# Altium PCB SPI-主板-开关.PcbDoc (part 1 of 11)
Units mm, origin at the board's own origin, x right, y up, seen from the top; angles counter-clockwise.
Board outline 97.69 x 103.45 mm, 2 copper layers (Top Layer, Bottom Layer); 86 components, 63 nets, 260 pads, 250 vias.
Unrouted connection lines stored in the file: 6.
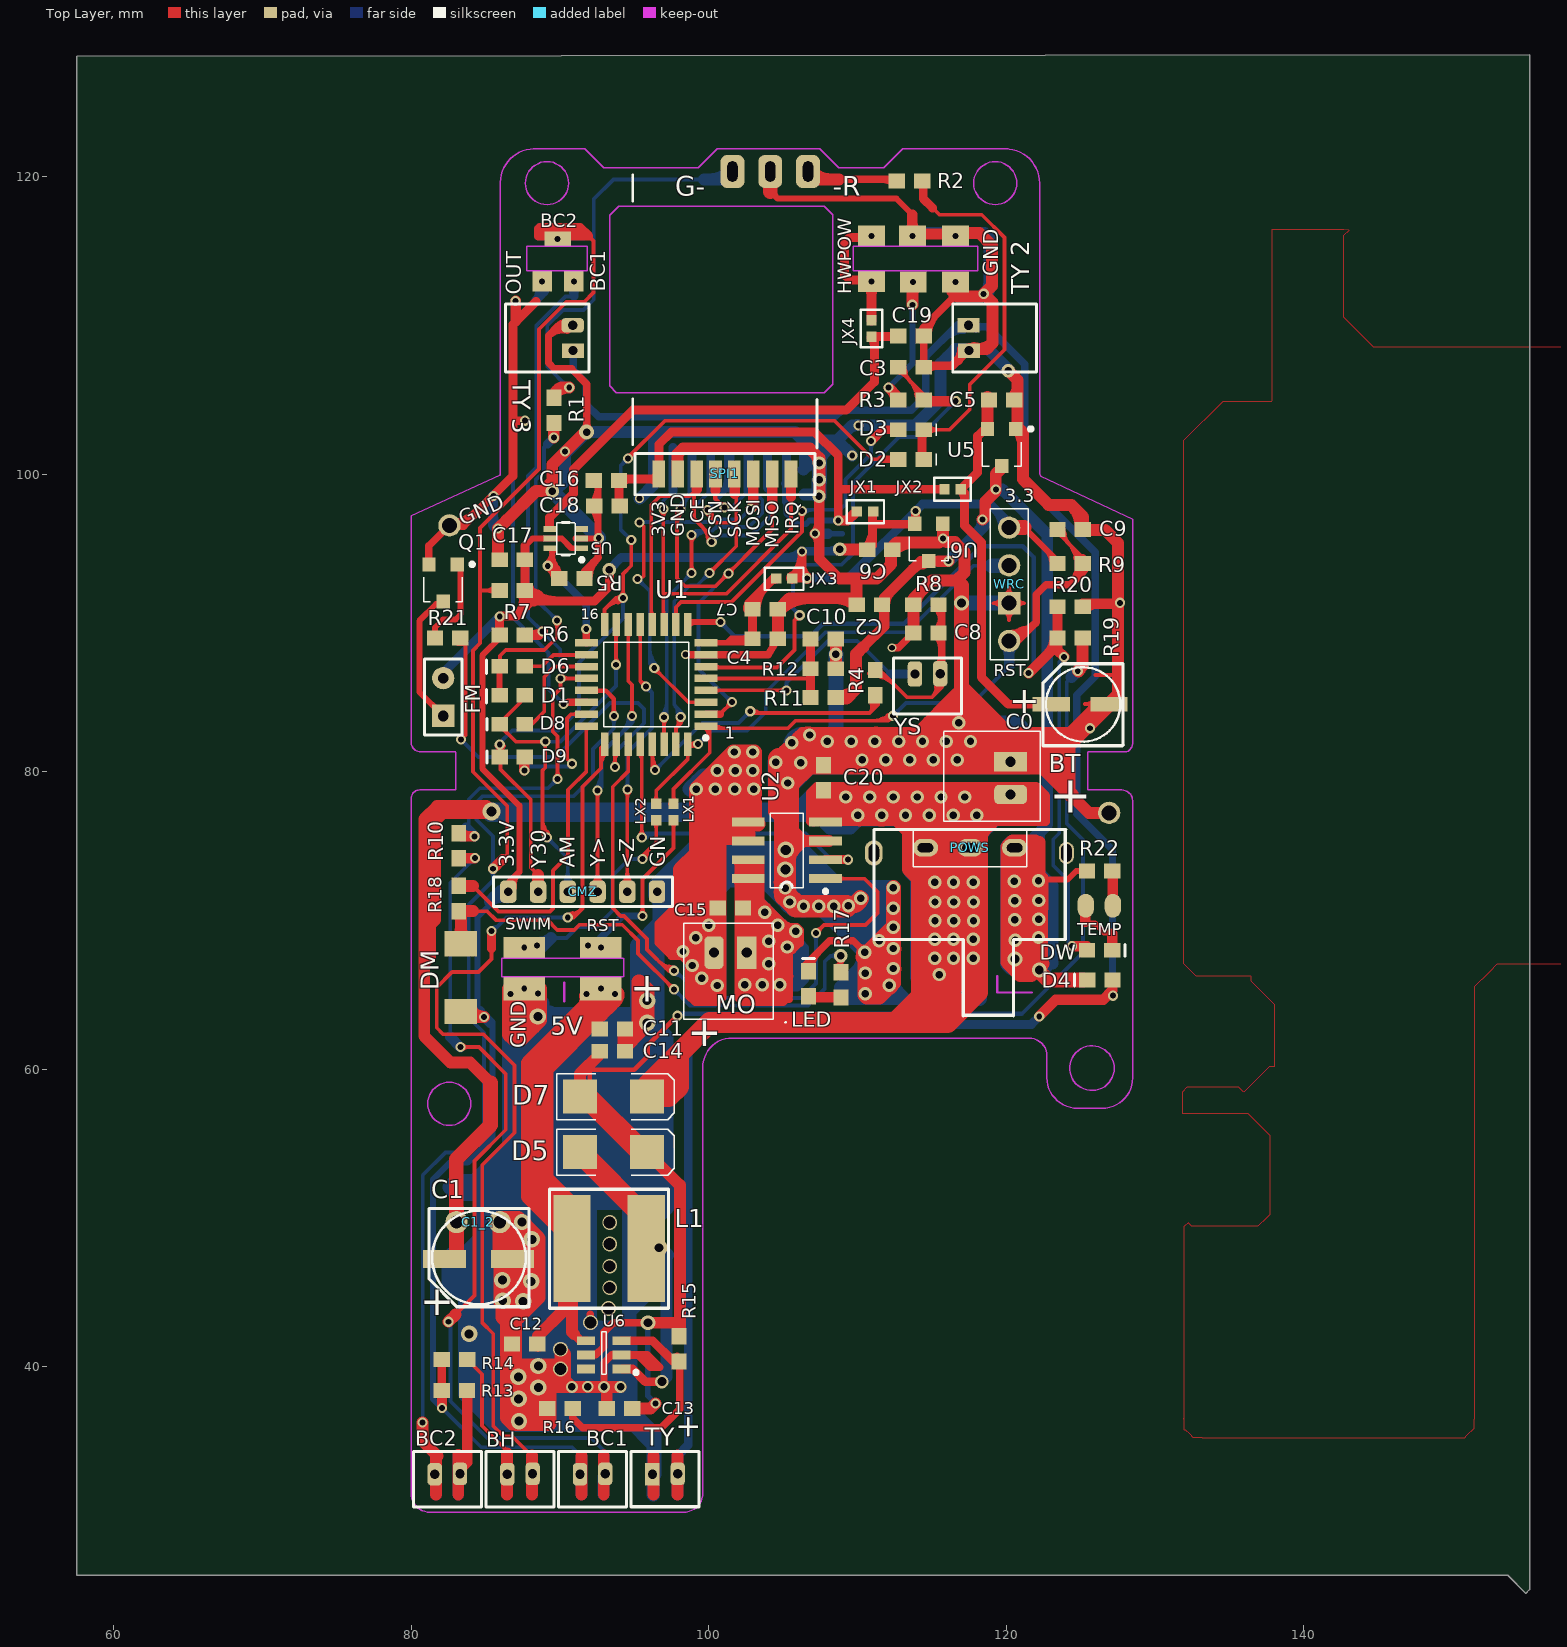
[diagram p0: Top Layer view]
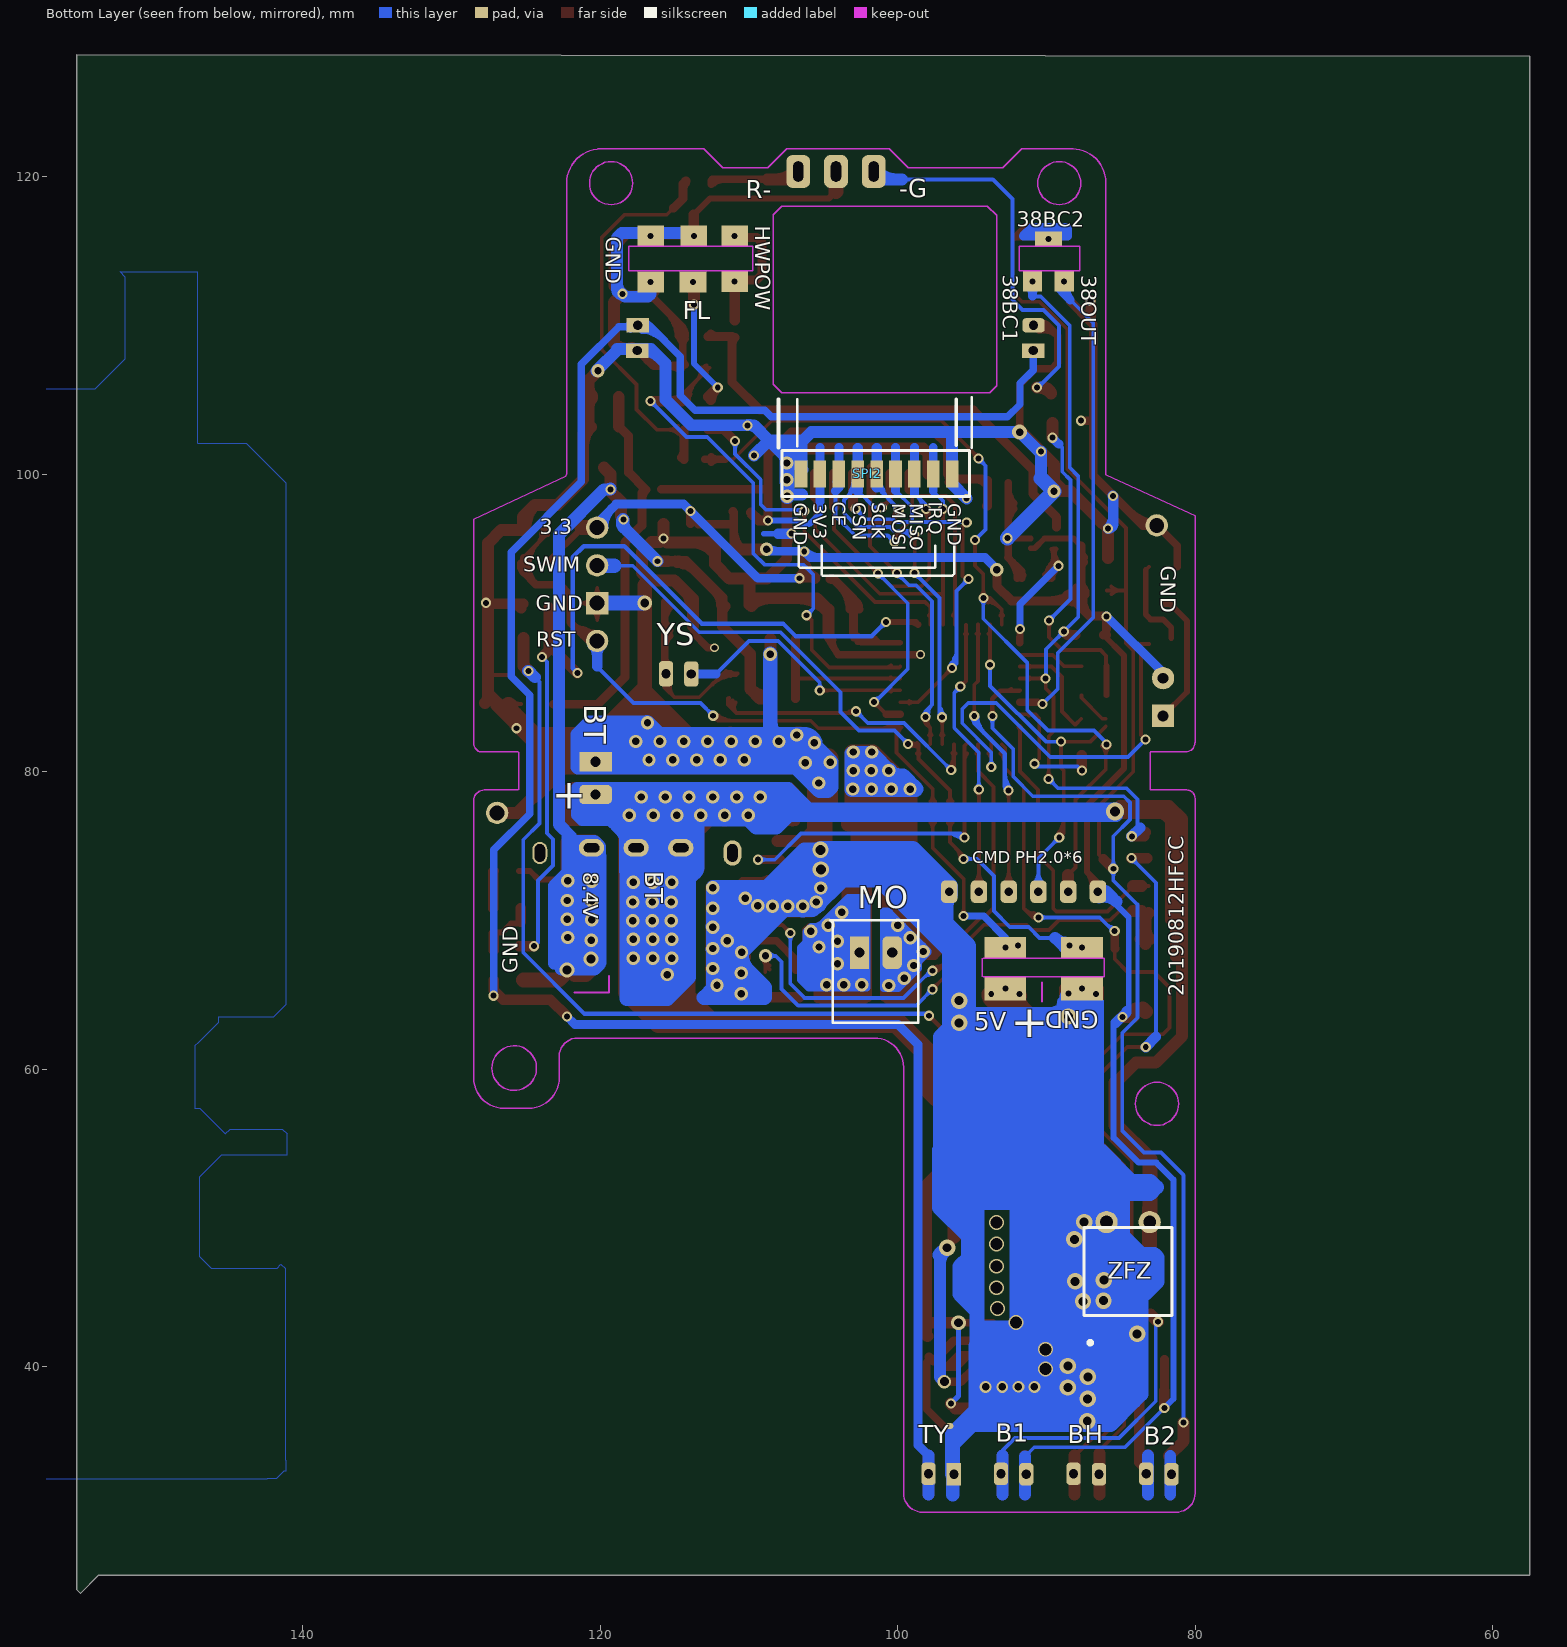
[diagram p1: Bottom Layer view, seen from below]

## Layer stack, top to bottom
Top Layer: signal copper 0.0356
Dielectric: dielectric 0.32, FR-4, Dk 4.8
Bottom Layer: signal copper 0.0356

## Board outline
57.506,128.118 57.506,25.984 153.721,25.984 154.94,24.765 155.194,25.019 155.194,128.219

## Design rules (kind name [scope] priority, off if disabled: settings)
Clearance [All] p1: gap=0.254
PolygonConnect [All] p1: connectstyle=Relief reliefconductorwidth=0.254 reliefentries=4 polygonreliefangle="90 Angle"
RoutingVias [All] p1: holewidth=0.711 width=1.27 viastyle="Through Hole" minholewidth=0.711 minwidth=1.27 maxholewidth=0.711 maxwidth=1.27
SilkscreenOverComponentPads [All] p1: minsilkscreentomaskgap=0.254
SolderMaskExpansion [All] p1: expansion=0.102
TestPointUsage FabricationTestPointUsage [All] p1: valid=0 allowmultiple=FALSE
Testpoint FabricationTestpoint [All] p1: side=3 testpointundercomponent=TRUE minsize=1.016 maxsize=2.54 preferedsize=1.524 minholesize=0 maxholesize=1.016 preferedholesize=0.813 testpointgrid=0.025 style=297 order=0123456789
Width [All] p1: maxlimit=2 minlimit=0.254 preferedwidth=0.254 minimp=50.000000 maximp=50.000000 favimp=50.000000
23 further rules are at their usual default settings.

## Components (designator, comment, footprint, x,y, rotation, side; value= is the part's Value field where it differs from the comment)
BC1 "1.5*2P" MHDR1X2#1 92.88,32.8 r180 top (schematic designator BT)
BC2 "1.5*2P" MHDR1X2#1 83.12,32.8 r180 top (schematic designator BT)
BH "1.5*2P" MHDR1X2#1 88,32.8 r180 top (schematic designator BT)
BT "PH2.0-W" HDR1X2#1 120.3,78.032 r90 top locked
C0 "47uf  5*5.8" CC3216-1206#1 123.7,84.932 r0 top locked
C1 "220UF" CC3216-1206#2 85.3,46.785 r180 top
C1_2 "" HDR1X2#2 76.987,50.285 r180 top
C2 "0.1uf" CR1608-0603#1 110.8,91.232 r0 top locked
C3 "0.01uf" CR1608-0603#1 113.6,107.2 r180 top locked
C4 "0.1uf" CR1608-0603#1 103.8,88.951 r0 top locked (schematic designator C6)
C5 "10uf" CR1608-0603#1 119.7,105 r180 top locked
C6 "0.1uf" CR1608-0603#1 111.5,94.932 r0 top locked
C7 "10uf" CR1608-0603#1 103.8,90.932 r180 top locked
C8 "0.01uf" CR1608-0603#1 114.6,89.332 r0 top locked
C9 "0.1uf" CR1608-0603#1 124.3,96.3 r180 top locked
C10 "0.01uf" CR1608-0603#1 107.7,88.932 r180 top locked
C11 "10uf" CR1608-0603#1 93.523,62.7 r0 top
C12 "10uf" CR1608-0603#1 87.63,41.529 r180 top
C13 "1uf" CR1608-0603#1 94,37.2 r180 top
C14 "10uf" CR1608-0603#1 93.523,61.211 r0 top
C15 "0.1uf" CR1608-0603#1 101.46,70.85 r0 top locked (schematic designator C4)
C16 "0.1uf" CR1608-0603#1 93.116,99.593 r0 top locked (schematic designator C4)
C17 "10uf" CR1608-0603#1 86.792,94.259 r180 top locked (schematic designator R6)
C18 "0.01uf" CR1608-0603#1 93.167,97.866 r0 top locked (schematic designator C4)
C19 "0.1uf" CR1608-0603#1 113.6,109.3 r180 top locked (schematic designator C2)
C20 "0.1uf" CR1608-0603#1 107.723,79.604 r270 top locked (schematic designator C11)
CMZ "CMD PH2.0*6" MHDR1X7 94.15,71.944 r180 top locked
D1 "SS14" CC1608-0603 86.792,85.15 r0 top
D2 "SS14" CC1608-0603 113.6,101 r180 top locked
D3 "SS14" CC1608-0603 113.6,103 r180 top locked
D4 "SS14" CC1608-0603 126.3,66 r0 top (schematic designator D8)
D5 "SS24" DSO-C2/X2.3 93.6,54.43 r0 top
D6 "SS14" CC1608-0603 86.792,87.1 r0 top (schematic designator D1)
D7 "SS24" DSO-C2/X2.3 93.6,58.166 r0 top (schematic designator D3)
D8 "SS14" CC1608-0603 86.792,83.2 r0 top
D9 "SS14" CC1608-0603 86.792,81 r0 top locked
DM "3*4*2小龟按钮" HDR1X2#3 85.344,70.032 r90 top locked (schematic designator FW)
DW "3V" CC1608-0603 126.289,68 r180 top (schematic designator D8)
FM "" HDR1X2#4 82.15,86.3 r270 top locked
JX1 "" CR1005-0402 110.515,97.5 r180 top locked
JX2 "" CR1005-0402 116.408,99 r0 top locked (schematic designator R8)
JX3 "" CR1005-0402 105.08,93 r0 top locked (schematic designator R8)
JX4 "" CR1005-0402 110.947,109.8 r90 top locked (schematic designator R8)
L1 "22UH" L7 93.3,47.94 r180 top locked
LED "LED-DM" CC1608-0603 106.7,65.75 r270 top locked
LX1 "4.7K" CR1005-0402 97.638,77.292 r90 top locked (schematic designator R8)
LX2 "4.7K" CR1005-0402 96.469,77.292 r90 top locked (schematic designator R8)
MO "PH2.0-W" HDR1X2#5 103,67.843 r180 top locked (schematic designator BT)
POWS "SS12F23" HDR1X3 120.114,74.892 r180 top locked (schematic designator WS)
Q1 "ME6209  18V  3UA" SO-G3/C2.5 82.144,92.7 r180 top (schematic designator U5)
R1 "4.7K" CR1608-0603#1 89.6,104.3 r270 top locked
R2 "4.7K" CR1608-0603#1 113.5,119.732 r0 top locked
R3 "1K" CR1608-0603#1 113.6,105 r180 top locked
R4 "1K" CR1608-0603#1 111.2,86 r270 top
R5 "10K" CR1608-0603#1 90.8,93 r180 top locked (schematic designator R7)
R6 "36K" CR1608-0603#1 86.792,89.2 r180 top locked
R7 "36K" CR1608-0603#1 86.792,92.2 r180 top locked (schematic designator R6)
R8 "1M" CR1608-0603#1 114.6,91.232 r180 top locked
R9 "10K" CR1608-0603#1 124.3,94 r180 top locked
R10 "10K" CR1608-0603#1 83.2,75.032 r270 top locked
R11 "1M" CR1608-0603#1 107.7,85 r0 top locked
R12 "500K" CR1608-0603#1 107.7,86.932 r180 top locked
R13 "1K" CR1608-0603#1 82.906,38.4 r0 top (schematic designator R21)
R14 "1K" CR1608-0603#1 82.906,40.5 r0 top (schematic designator R21)
R15 "100K" CR1608-0603#1 98,41.2 r270 top
R16 "7.89K" CR1608-0603#1 90,37.2 r180 top
R17 "1K" CR1608-0603#1 108.9,65.681 r90 top locked (schematic designator R19)
R18 "10K" CR1608-0603#1 83.2,71.482 r90 top locked
R19 "10K" CR1608-0603#1 124.3,89 r180 top locked (schematic designator R9)
R20 "4.7K" CR1608-0603#1 124.3,91.1 r180 top locked
R21 "100K" CR1608-0603#2 82.45,89 r180 top (schematic designator R7)
R22 "1K" CR1608-0603#1 126.289,73.33 r180 top (schematic designator R4)
SPI1 "SI24R1" MHDR1X8 105.537,100.032 r180 top locked
SPI2 "NRF24RL01" MHDR1X8 97.6,100.032 r0 bottom locked
TY "1.5*2P" MHDR1X2#2 97.75,32.8 r180 top (schematic designator BT)
"TY 2" "1.5*2P" MHDR1X2#3 117.475,109.855 r270 top locked (schematic designator BT)
"TY 3" "1.5*2P" MHDR1X2#4 90.881,108.483 r90 top locked (schematic designator BT)
U1 "STM8L151K4T6" TQFP32 95.8,85.877 r180 top locked
U2 "MX380（RZ7889D）" SO8 105.254,74.722 r90 top locked
U5 "ME6209  18V  3UA" SO-G3/C2.5 119.7,101.8 r180 top
U5 "BL1551" SOT23-6_N 90.4,95.682 r180 top locked
U6 "SX1308  B6286" SOT23-6_M 92.95,40.8 r180 top locked
U6 "ME6209  18V  3UA" SO-G3/C2.5 114.8,95.432 r180 top locked (schematic designator U4)
WRC "2.54HP" HDR1X4 120.2,88.8 r90 top locked (schematic designator SX)
YS "1.5*2P" MHDR1X2#5 115.4,86.6 r180 top locked (schematic designator BT)
ZFZ "5.8*5.8zs" DPDT-6 84.506,46.456 r90 bottom

## Footprints (in the part's own frame and the unit in brackets; to place one, negate y for a bottom-side part, rotate by r counter-clockwise, add the part's x,y. Pads: shape width x height; smd on the part's side, far side on the other; paste and mask are expansions set on the pad)
CC1608-0603 [mm]
  rect 1.1x1 smd: 1(-0.85,0) 2(0.85,0)
  silkscreen extent -1.7,-0.4 -1.7,0.4
CC3216-1206#1 [mm]
  rect 2.5x1 smd: 1(-0.662,-0.386) 2(3.213,-0.386)
CC3216-1206#2 [mm]
  rect 2.9x1.2 smd: 1(-1.5,-0.45) 2(3.068,-0.455)
CR1005-0402 [mm]
  rect 0.7x0.7 smd: 1(-0.55,0) 2(0.551,0)
CR1608-0603#1 [mm]
  rect 1.1x1 smd: 1(-0.85,0) 2(0.85,0)
CR1608-0603#2 [mm]
  rect 1.1x1 smd: 1(-0.85,0)
  rect 1.1x1 smd paste+0: 2(0.85,0)
DPDT-6 [mm] "Double-Pole, Double-Throw Switch; 6 Leads"
  silkscreen extent -4.96,-2.95 2.92,2.95
DSO-C2/X2.3 [mm] "DO-214-AA/SMB; 2 C-Bend Leads; Body 5.3 x 3.6 mm, inc. leads (LxW)"
  rect 2.3x2.3 smd: 1(-2.25,0) 2(2.25,0)
  silkscreen extent -3.8,-1.55 4.1,1.55
HDR1X2#1 [mm]
  rrect50% 1.3x2.2 hole 0.68: 1(0.44,0)
  rect 1.3x2.2 hole 0.68: 2(2.642,0.003)
  silkscreen extent -1.34,-1.99 4.68,4.49
HDR1X2#2 [mm] "Connector; Header; 2 Position"
  round 1.5 hole 0.86: 1(-8.963,0.558) 2(-6.063,0.558)
HDR1X2#3 [mm]
  rect 1.7x2.2 smd: 1(-6.147,2.004) 2(-1.6,2.004)
HDR1X2#4 [mm] "Connector; Header; 2 Position"
  round 1.5 hole 0.72: 1(0,0)
  rect 1.5x1.5 hole 0.72: 2(2.54,0)
  silkscreen extent -1.27,-1.27 3.81,1.27
HDR1X2#5 [mm]
  rect 1.3x2.2 hole 0.68: 1(0.44,0)
  rrect50% 1.3x2.2 hole 0.68: 2(2.642,0.003)
  silkscreen extent -1.34,-1.99 4.68,4.49
HDR1X3 [mm]
  oval 1.7x1.2 hole 0.6 slot 1.05 at 0 deg: 1(-0.46,0) 2(2.54,0) 3(5.54,0)
  silkscreen extent -1.27,-1.27 6.35,1.27
HDR1X4 [mm]
  round 1.5 hole 1: 1(0,0) 3(5.08,0) 4(7.62,0)
  rect 1.5x1.5 hole 1: 2(2.54,0)
  silkscreen extent -1.27,-1.27 8.89,1.27
L7 [mm]
  rect 2.5x7.2 smd: 1(2.5,0) 2(-2.5,0)
  silkscreen extent -4,-4 4,4
MHDR1X2#1 [mm]
  rrect50% 0.96x1.5 hole 0.62: 1(-0.164,0) 2(1.536,0.026)
  silkscreen extent -1.6,-1.49 2.97,2.22
MHDR1X2#2 [mm]
  rrect50% 0.96x1.5 hole 0.62: 1(-0.164,0)
  rect 0.96x1.5 hole 0.62: 2(1.536,0.026)
  silkscreen extent -1.6,-1.52 2.97,2.22
MHDR1X2#3 [mm]
  rect 0.96x1.5 hole 0.62: 1(-0.164,0) 2(1.536,0.026)
  silkscreen extent -1.6,-1.07 2.97,4.55
MHDR1X2#4 [mm]
  rect 0.96x1.5 hole 0.62: 1(-0.164,0)
  rrect50% 0.96x1.5 hole 0.62: 2(1.536,0.026)
  silkscreen extent -1.6,-1.07 2.97,4.55
MHDR1X2#5 [mm]
  rrect50% 0.96x1.7 hole 0.62: 1(-0.164,0) 2(1.536,0.026)
  silkscreen extent -1.6,-1.07 2.97,2.72
MHDR1X7 [mm] "Connector; Header; 7 Position"
  rrect50% 1.1x1.5 hole 0.58: 2(-2.38,0) 3(-0.38,0) 4(1.62,0) 5(3.62,0) 6(5.62,0) 7(7.62,0)
  silkscreen extent -3.41,-1 8.62,1
MHDR1X8 [mm] "Connector; Header; 8 Position"
  rect 0.85x1.8 smd: 1(0,0) 2(1.27,0) 3(2.54,0) 4(3.81,0) 5(5.08,0) 6(6.35,0) 7(7.62,0) 8(8.89,0)
  silkscreen extent -1.6,-1.37 10.49,1.4
SO8 [mm]
  rect 0.6x2.2 smd: 1(-1.905,-2.6) 2(-0.635,-2.6) 3(0.635,-2.6) 4(1.905,-2.6) 5(1.905,2.6) 6(0.635,2.6) 7(-0.635,2.6) 8(-1.905,2.6)
  silkscreen extent -2.88,-2.72 2.5,1.1
SO-G3/C2.5 [mm]
  rect 0.9x0.95 smd: 1(-0.95,-1.25) 2(0.95,-1.25) 3(0,1.25)
  silkscreen extent -2.08,-1.37 1.3,1.25
SOT23-6_M [mm]
  rect 1.2x0.59 smd: 1(-1.2,0.95) 2(-1.2,0) 3(-1.2,-0.95) 4(1.2,-0.95) 5(1.2,0) 6(1.2,0.95)
  silkscreen extent -2.29,-1.55 0.15,1.31
SOT23-6_N [mm] "SOT23, 6-Leads, Body 2.9x1.6mm, Pitch 0.95mm, Lead Span 2.7mm, IPC Medium Density"
  rect 0.9x0.39 smd: 1(-1.05,0.65) 2(-1.05,0) 3(-1.05,-0.65) 4(1.05,-0.65) 5(1.05,0) 6(1.05,0.65)
  silkscreen extent -1.19,-1.09 0.63,1.55
TQFP32 [mm] "QFP; 32 Leads; Body 7 x 7 mm; Pitch 0.8 mm"
  rect 1.55x0.5 smd: 1(-4.025,2.8) 2(-4.025,2) 3(-4.025,1.2) 4(-4.025,0.4) 5(-4.025,-0.4) 6(-4.025,-1.2) 7(-4.025,-2) 8(-4.025,-2.8) 18(4.025,-2) 19(4.025,-1.2) 20(4.025,-0.4) 21(4.025,0.4) 22(4.025,1.2) 23(4.025,2) 24(4.025,2.8)
  rect 0.5x1.55 smd: 9(-2.8,-4.025) 10(-2,-4.025) 11(-1.2,-4.025) 12(-0.4,-4.025) 13(0.4,-4.025) 14(1.2,-4.025) 15(2,-4.025) 16(2.8,-4.025) 26(2,4.025) 27(1.2,4.025) 28(0.4,4.025) 29(-0.4,4.025) 30(-1.2,4.025) 31(-2,4.025) 32(-2.8,4.025)
  rect 1.55x0.5 smd mask+0.102: 17(4.025,-2.8)
  rect 0.5x1.55 smd paste+0: 25(2.8,4.025)
  silkscreen extent -4.13,-2.85 2.85,3.72

## Part data
D1 D2 D6: library part C
D4 DW: library part "Cap Semi", "Capacitor (Sem"
LX2: library part Res3
U1: library part ST72F324K4T6
U2: library part LM135
ZFZ: library part SW-DPST

## Free pads (board coordinates)
  rect 2.8x1.6 hole 0.4: 0(87.6,65.432)
  rect 2.8x1.4 hole 0.4: 0(87.6,68.182) 0(92.75,68.182)
  rect 1.3x1.4 hole 0.4: 0(88.8,112.98) 0(90.932,112.98)
  rect 1.8x1 hole 0.4: 0(89.85,115.832)
  rect 2.8x1.6 hole 0.4 mask+0.102: 0(92.75,65.432)
  rect 0.85x1.8 smd far side: 0(96.33,100.032)
  oval 0.5x0.4 smd far side: 0(96.495,36.017)
  rrect50% 1.6x2.2 hole 0.68 slot 1.36 at 90 deg: 0(101.6,120.36) 0(104.14,120.36) 0(106.68,120.36)
  rect 1.8x1.4 hole 0.4: 0(110.95,112.956) 0(110.95,116.032) 0(113.7,116.032) 0(113.75,112.932) 0(116.6,112.932) 0(116.6,116.032)
  oval 1.2x1.7 hole 0.7 slot 1.2 at 90 deg: 3(111.103,74.545)
  round 1.5 hole 1 paste+0: 4(82.575,96.571)
  oval 1x1.5 hole 0.7 slot 1.2 at 90 deg: 4(124.051,74.545)
  oval 1.1x1.6 smd: 4(125.349,71) 4(127.178,71)
  round 1.5 hole 1: 4(126.924,77.241)

## Via types
v1: diameter 0.9, hole 0.5, Top Layer to Bottom Layer, 104 vias
v2: diameter 0.68, hole 0.4, Top Layer to Bottom Layer, 100 vias
v3: diameter 1.1, hole 0.6, Top Layer to Bottom Layer, tented both sides, 16 vias
v4: diameter 1, hole 0.8, Top Layer to Bottom Layer, tented both sides, 8 vias
v5: diameter 1, hole 0.6, Top Layer to Bottom Layer, 4 vias
v6: diameter 0.8, hole 0.5, Top Layer to Bottom Layer, 4 vias
v7: diameter 0.7, hole 0.4, Top Layer to Bottom Layer, 4 vias
v8: diameter 0.6, hole 0.4, Top Layer to Bottom Layer, 3 vias
v9: diameter 1.1, hole 0.68, Top Layer to Bottom Layer, 2 vias
v10: diameter 0.8, hole 0.4, Top Layer to Bottom Layer, 2 vias
v11: diameter 1, hole 0.5, Top Layer to Bottom Layer, 1 vias
v12: diameter 0.9, hole 0.6, Top Layer to Bottom Layer, tented bottom, 1 vias
v13: diameter 1.2, hole 0.68, Top Layer to Bottom Layer, 1 vias

## Nets (pads, with @x,y where several pads share a name; then routed paths per layer and width w, separated by ;. In a path a pad name is that pad's centre, name@x,y a point inside that pad or via, vN(x,y) a via of type N, cw(c..) or ccw(c..) an arc to the next point about the centre after c; other vN are vias at no path point)
1D-: D5.1 L1.2 U6.1@94.15,39.85 | length 23.6
  Top Layer w0.59: U6.1@94.2,39.85 94.897,39.85 95.747,39 v12(96.85,39)
  Top Layer w0.8: L1.2@95.8,49.98 95.8,49.081 96.23,48.652 L1.2@96.23,49.476
  Top Layer w1.5: D5.1@91.35,54.43 L1.2@95.8,49.98
  Bottom Layer w0.8: v12(96.85,39) 97.155,39.305 97.155,47.514 ; v3(96.668,48.002) cw(c95.492,46.826) 97.155,46.826 ccw(c95.492,46.826) v3(96.668,48.002)
  Bottom Layer w1: v3(96.668,48.002) 97.155,47.514
1R-1: R15.2 R16.1 U6.3@94.15,41.75 | length 16.2
  Top Layer w0.5: R16.1@90.85,37.2 90.85,36.556 91.516,35.89 96.799,35.89 98.044,37.135 R15.2@98.044,40.306
  Top Layer w0.59: U6.3@94.15,41.75 96.223,41.75 97.607,40.366 R15.2@97.892,40.65
3-BH: BH.2 R14.2 | length 10.3
  Top Layer w0.254: R14.2@83.756,40.5 84.76,39.496 84.76,36.036 86.614,34.181
  Top Layer w0.8: 86.436,31.394 86.436,34.176
3-WZ: BC2.1 R13.2 | length 11
  Top Layer w0.7: BC2.1@83.184,33 83.756,33.571 R13.2@83.756,38.4
  Top Layer w0.8: 83.164,31.4 83.164,34.087
  Bottom Layer w0.8: 83.164,31.4 83.164,34.032
3.3V: BC1.2 C4.1 C6.1 C7.2 C17.1 CMZ.7 DM.1 FM.1 JX1.1 JX3.1 JX3.2 R6.2 R7.1 R9.2 R13.1 R14.1 U1.8 U5.1@91.45,95.032 U5.5 U6.2@113.85,96.682 WRC.4 | length 247.7
  Top Layer w0.254: R13.1@82.056,38.4 R13.1@82.067,38.388
  Top Layer w0.395: 87.655,95.174 88.163,95.682 90.119,95.682 90.769,95.032 U5.1@91.05,95.032
  Top Layer w0.4: R6.2@86.152,89.2 84.785,87.833 84.785,80.213 87.274,77.724 87.274,73.279 ; CMZ.7@86.53,71.944 86.53,72.535 87.274,73.279 ; U1.8@99.825,88.677 100.711,88.677 ; C4.1@102.95,88.951 101.518,88.951 101.244,88.677 100.711,88.677 ; C4.1@102.95,89.156 102.472,88.677 100.711,88.677 ; 121.207,96.42 R9.2@123.539,94.089 ; CMZ.7@86.53,72.144 cw(c87.193,72.248) 86.719,72.723 ; CMZ.7@86.53,72.144 cw(c87.193,72.248) 86.719,72.723 ; CMZ.7@86.53,72.144 ccw(c85.701,73.17) 87.013,73.031 ; CMZ.7@86.53,72.144 cw(c87.193,72.248) 86.719,72.723 ; CMZ.7@86.53,72.144 ccw(c85.701,73.17) 87.013,73.031 ; CMZ.7@86.53,72.144 ccw(c85.701,73.17) 87.013,73.031 ; CMZ.7@86.925,72.206 cw(c88.154,72.399) 87.274,73.279 ; CMZ.7@86.925,72.206 cw(c88.154,72.399) 87.274,73.279 ; CMZ.7@86.925,72.206 cw(c88.154,72.399) 87.274,73.279 ; 101.516,88.677 ccw(c101.516,90.335) C4.1@102.688,89.163 ; 101.516,88.677 ccw(c101.516,90.335) C4.1@102.688,89.163 ; 101.516,88.677 ccw(c101.516,90.335) C4.1@102.688,89.163 ; 102.09,88.818 cw(c102.338,88.389) C4.1@102.688,88.739 ; 102.09,88.818 cw(c102.338,88.389) C4.1@102.688,88.739 ; 102.09,88.818 cw(c102.338,88.389) C4.1@102.688,88.739 ; 102.176,88.951 ccw(c102.176,89.675) C4.1@102.688,89.163 ; 102.176,88.951 cw(c102.176,88.227) C4.1@102.688,88.739 ; 102.176,88.951 ccw(c102.176,89.675) C4.1@102.688,89.163 ; 102.176,88.951 cw(c102.176,88.227) C4.1@102.688,88.739 ; 102.176,88.951 ccw(c102.176,89.675) C4.1@102.688,89.163 ; 102.176,88.951 cw(c102.176,88.227) C4.1@102.688,88.739 ; 122.727,94.9 cw(c121.827,94) R9.2@123.1,94 ; 122.727,94.9 cw(c121.827,94) R9.2@123.1,94 ; 122.727,94.9 cw(c121.827,94) R9.2@123.1,94
  Top Layer w0.6: R13.1@82.056,38.4 R14.1@82.056,40.5 ; R6.2@85.942,89.2 R6.2@86.152,89.2 ; R6.2@85.942,89.6 85.942,90.475 87.097,90.475 ; 87.655,91.084 87.655,95.174 ; R7.1@87.87,92.291 ccw(c88.335,92.529) 88.335,92.007 ; v1(93.32,93.574) 93.32,92.481 92.329,91.491 88.113,91.491 87.097,90.475 ; C7.2@102.6,90.932 cw(c103.359,90.932) 102.822,91.468 ; C4.1@102.95,89.156 102.95,91.596 104.326,92.973 JX3.1@104.53,92.973 ; C7.2@103.2,90.932 cw(c105.407,90.932) 103.846,92.493 ; JX3.2@105.63,93 105.644,93.015 v2(106.604,93.015) ; 106.274,93.345 v2(106.274,94.818) ; C6.1@111.012,95.213 111.012,96.647 ; JX1.1@111.066,97.5 111.012,97.446 111.012,96.647 ; 113.386,96.647 111.012,96.647 ; U6.2@113.919,96.682 113.919,97.511 v2@113.932,97.523 ; 87.097,90.475 ccw(c86.045,91.526) R7.1@87.409,92.12 ; 87.097,90.475 ccw(c86.045,91.526) R7.1@87.409,92.12 ; 87.097,90.475 ccw(c86.045,91.526) R7.1@87.409,92.12 ; R7.1@87.409,91.917 ccw(c88.438,92.946) 88.438,91.491 ; R7.1@87.409,91.917 ccw(c88.438,92.946) 88.438,91.491 ; R7.1@87.409,91.917 ccw(c88.438,92.946) 88.438,91.491 ; R7.1@87.501,92.059 cw(c87.127,91.685) 87.655,91.685 ; R7.1@87.501,92.059 cw(c87.127,91.685) 87.655,91.685 ; R7.1@87.501,92.059 cw(c87.127,91.685) 87.655,91.685 ; R7.1@87.501,92.341 ccw(c87.127,92.715) 87.655,92.715 ; R7.1@87.501,92.341 ccw(c87.127,92.715) 87.655,92.715 ; R7.1@87.501,92.341 ccw(c87.127,92.715) 87.655,92.715 ; C17.1@87.5,94.118 cw(c87.126,93.744) 87.655,93.744 ; C17.1@87.5,94.118 cw(c87.126,93.744) 87.655,93.744 ; C17.1@87.5,94.118 cw(c87.126,93.744) 87.655,93.744 ; C17.1@87.5,94.401 ccw(c87.126,94.775) 87.655,94.775 ; C17.1@87.5,94.401 ccw(c87.126,94.775) 87.655,94.775 ; C17.1@87.5,94.401 ccw(c87.126,94.775) 87.655,94.775 ; 87.719,91.098 ccw(c86.913,91.904) R7.1@87.959,92.36 ; 87.719,91.098 ccw(c86.913,91.904) R7.1@87.959,92.36 ; 87.719,91.098 ccw(c86.913,91.904) R7.1@87.959,92.36 ; R7.1@87.833,92.341 ccw(c89.887,94.395) 89.887,91.491 ; R7.1@87.833,92.341 ccw(c89.887,94.395) 89.887,91.491 ; R7.1@87.833,92.341 ccw(c89.887,94.395) 89.887,91.491 ; R7.1@87.89,92.173 ccw(c88.626,92.072) 88.255,91.429 ; R7.1@87.89,92.173 ccw(c88.626,92.072) 88.255,91.429 ; R7.1@87.89,92.173 ccw(c88.626,92.072) 88.255,91.429 ; 104.144,92.79 cw(c104.53,92.405) JX3.1@104.53,92.95 ; 104.144,92.79 cw(c104.53,92.405) JX3.1@104.53,92.95 ; 104.144,92.79 cw(c104.53,92.405) JX3.1@104.53,92.95 ; JX3.2@105.594,93.035 ccw(c103.954,94.675) v2@106.274,94.675 ; JX3.2@105.594,93.035 ccw(c103.954,94.675) v2@106.274,94.675 ; JX3.2@105.594,93.035 ccw(c103.954,94.675) v2@106.274,94.675 ; 106.274,93.909 ccw(c107.498,93.909) v2@106.632,93.043 ; 106.274,93.909 ccw(c107.498,93.909) v2@106.632,93.043 ; 106.274,93.909 ccw(c107.498,93.909) v2@106.632,93.043 ; C6.1@110.559,95.073 ccw(c109.465,96.167) 111.012,96.167 ; C6.1@110.559,95.073 ccw(c109.465,96.167) 111.012,96.167 ; C6.1@110.559,95.073 ccw(c109.465,96.167) 111.012,96.167 ; U6.2@113.744,96.813 ccw(c113.321,97.236) v2@113.919,97.236 ; U6.2@113.744,96.813 ccw(c113.321,97.236) v2@113.919,97.236 ; U6.2@113.744,96.813 ccw(c113.321,97.236) v2@113.919,97.236 ; R7.1@87.744,92.007 cw(c88.039,90.903) 88.611,91.893 ccw(c88.039,90.903) R7.1@87.744,92.007
  Top Layer w0.7: v2(82.067,37.234) R13.1@82.067,38.388
  Top Layer w0.8: DM.1@83.994,64.082 ccw(c84.887,64.519) v2(84.887,63.525) DM.1@84.126,63.525 ; 91.444,31.4 91.444,34.006 ; 106.274,93.345 v2(106.604,93.015) ; v1@108.839,94.945 C6.1@110.744,94.945 ; JX3.2@105.596,93.037 cw(c106.088,92.499) v2(106.604,93.015) ; JX3.2@105.596,93.037 cw(c106.088,92.499) v2(106.604,93.015) ; JX3.2@105.596,93.037 cw(c106.088,92.499) v2(106.604,93.015)
  Top Layer w1: DM.1@83.34,63.885 DM.1@83.515,64.06 ; WRC.4@120.2,96.42 121.207,96.42
  Bottom Layer w0.254: v2(82.067,37.234) 84.707,34.595 90.805,34.595 91.44,33.96
  Bottom Layer w0.4: v2@82.056,37.234 81.458,37.832 81.458,52.578 82.601,53.721 83.795,53.721 85.468,55.394 85.468,62.97 85.319,63.119 ; 85.293,71.272 85.293,71.069 84.455,70.231 84.455,64.059 84.607,63.906 ; 84.576,63.938 cw(c84.164,63.525) v2@84.747,63.525 ; 84.576,63.938 cw(c84.164,63.525) v2@84.747,63.525 ; 84.576,63.938 cw(c84.164,63.525) v2@84.747,63.525 ; 84.607,63.906 cw(c84.268,63.567) v2@84.747,63.535 ; 84.607,63.906 cw(c84.268,63.567) v2@84.747,63.535 ; 84.607,63.906 cw(c84.268,63.567) v2@84.747,63.535
  Bottom Layer w0.6: FM.1@82.15,86.157 82.15,86.671 v2@85.954,90.475 ; v1@93.307,93.586 94.132,94.412 105.867,94.412 106.284,94.828 108.671,94.828 v1(108.814,94.971) ; v2(106.604,93.015) 109.398,93.015 114.376,97.993 118.923,97.993 120.2,96.716 WRC.4@120.2,96.42 ; 108.107,94.828 ccw(c108.107,95.677) v1@108.708,95.077 ; 108.107,94.828 ccw(c108.107,95.677) v1@108.708,95.077 ; 108.107,94.828 ccw(c108.107,95.677) v1@108.708,95.077 ; v1@108.397,94.828 ccw(c108.397,95.279) v1@108.716,94.96 ; v1@108.397,94.828 ccw(c108.397,95.279) v1@108.716,94.96 ; v1@108.397,94.828 ccw(c108.397,95.279) v1@108.716,94.96 ; 119.223,97.693 cw(c117.949,96.42) WRC.4@119.75,96.42 ; 119.223,97.693 cw(c117.949,96.42) WRC.4@119.75,96.42 ; 119.223,97.693 cw(c117.949,96.42) WRC.4@119.75,96.42 ; 105.196,94.412 ccw(c105.196,95.896) 106.245,94.846 cw(c105.196,95.896) 105.196,94.412
  Bottom Layer w0.7: 84.607,63.906 84.607,63.83 85.319,63.119
  Bottom Layer w0.8: 85.572,71.602 ccw(c85.633,72.743) CMZ.7@86.396,71.893 ; CMZ.7@86.579,71.993 86.014,71.993 85.293,71.272 ; 91.44,31.4 91.44,33.96 ; 85.293,71.272 cw(c86.11,70.456) 86.468,71.554 ccw(c86.11,70.456) 85.293,71.272
  other v2: 85.954,90.449 108.744,94.932 113.919,97.536
3V3: C0.1 C5.2 C16.2 C18.2 JX1.2 JX2.1 JX2.2 SPI1.8 SPI2.7 U5.2@118.75,103.05 | length 77.4
  Top Layer w0.4: C16.2@93.966,99.593 94.056,99.593 C16.2@94.158,99.492 ; SPI1.8@96.647,99.746 SPI1.8@96.647,100.032 ; 97.46,102.845 97.485,102.845
  Top Layer w0.6: C16.2@93.966,99.593 93.966,97.866 C18.2@94.017,97.866 ; C16.2@94.158,99.492 94.361,99.695 96.31,99.695 SPI1.8@96.647,100.032 96.647,102.006 97.485,102.845 107.137,102.845 108.712,101.27 v2(108.712,96.901) v2(108.712,96.901) ; 108.712,99 JX2.1@115.858,99 ; U5.2@118.745,103.226 118.085,102.565 118.085,100.127 JX2.2@116.958,99 117.196,98.762 117.196,96.571 118.339,95.428 118.339,86.36 120.153,84.546 C0.1@123.038,84.546 C0.1@123.138,84.546 ; C16.2@94.158,99.452 cw(c94.745,98.865) 94.745,99.695 ; C16.2@94.158,99.452 cw(c94.745,98.865) 94.745,99.695 ; C16.2@94.158,99.452 cw(c94.745,98.865) 94.745,99.695 ; 96.012,99.695 cw(c96.012,98.921) SPI1.8@96.559,99.468 ; 96.012,99.695 cw(c96.012,98.921) SPI1.8@96.559,99.468 ; 96.012,99.695 cw(c96.012,98.921) SPI1.8@96.559,99.468 ; JX2.2@116.923,98.965 cw(c116.264,98.306) 117.196,98.306 ; JX2.2@116.923,98.965 cw(c116.264,98.306) 117.196,98.306 ; JX2.2@116.923,98.965 cw(c116.264,98.306) 117.196,98.306
  Top Layer w0.7: v2(108.712,96.901) 109.321,96.9 JX1.2@109.855,97.434
  Top Layer w0.8: U5.2@118.745,103.226 C5.2@118.745,105.2
  Bottom Layer w0.4: SPI2.7@105.22,100.088 105.22,97.37 105.943,96.647 106.529,96.647 106.783,96.901 v2(108.712,96.901) ; SPI2.7@105.061,99.398 cw(c104.677,99.014) 105.22,99.014 ; SPI2.7@105.061,99.398 cw(c104.677,99.014) 105.22,99.014 ; SPI2.7@105.061,99.398 cw(c104.677,99.014) 105.22,99.014 ; 105.22,99.014 cw(c105.763,99.014) SPI2.7@105.379,99.398 ; 105.22,99.014 cw(c105.763,99.014) SPI2.7@105.379,99.398 ; 105.22,99.014 cw(c105.763,99.014) SPI2.7@105.379,99.398
  Bottom Layer w0.6: 105.22,98.171 105.22,101.803
5V: C11.1 C12.1 L1.1 pad.0@92.75,65.432 U6.4 | length 110.3
  Top Layer w0.6: 90.957,42.189 91.397,41.75 U6.4@91.75,41.75
  Top Layer w0.8: C12.1@88.519,41.402 88.519,42.062 90.272,43.815 90.272,45.263 L1.1@90.8,47.94 90.8,48.519 90.8,49.713 87.884,52.629 88.519,53.264 ; 88.519,52.349 88.519,53.264 ; L1.1@90.805,45.263 90.805,42.342 90.957,42.189 ; 88.519,53.264 88.519,56.325 88.557,56.363 88.557,53.302 88.519,53.264
  Top Layer w1: 88.925,59.868 92.75,63.692 ; 88.925,60.833 pad.0@92.75,64.658 ; L1.1@90.8,48.519 87.884,51.435 87.884,52.629 87.884,60.427 91.948,64.491 pad.0@91.948,64.846 ; L1.1@90.8,49.713 90.8,50.957 89.052,52.705 89.052,56.363 ; 89.052,56.363 89.052,59.995 88.621,60.427 88.138,60.427 88.557,60.008 88.557,56.363 89.052,56.363 ; 91.531,64.073 ccw(c90.529,65.075) pad.0@91.946,65.075 ; 91.531,64.073 ccw(c90.529,65.075) pad.0@91.946,65.075 ; 91.531,64.073 ccw(c90.529,65.075) pad.0@91.946,65.075 ; pad.0@91.785,64.925 ccw(c91.822,65.435) pad.0@92.156,65.048 ; pad.0@91.785,64.925 ccw(c91.822,65.435) pad.0@92.156,65.048 ; pad.0@91.785,64.925 ccw(c91.822,65.435) pad.0@92.156,65.048 ; pad.0@91.785,64.925 ccw(c91.822,65.435) pad.0@92.156,65.048 ; 91.795,64.515 cw(c92.841,64.234) pad.0@92.3,65.172 ; 91.795,64.515 cw(c92.841,64.234) pad.0@92.3,65.172 ; 91.795,64.515 cw(c92.841,64.234) pad.0@92.3,65.172 ; pad.0@91.804,64.925 ccw(c91.761,65.653) pad.0@92.306,65.169 ; pad.0@91.804,64.925 ccw(c91.761,65.653) pad.0@92.306,65.169 ; pad.0@91.804,64.925 ccw(c91.761,65.653) pad.0@92.306,65.169 ; pad.0@91.804,64.925 ccw(c91.761,65.653) pad.0@92.306,65.169 ; pad.0@91.804,64.925 ccw(c91.761,65.653) pad.0@92.306,65.169 ; pad.0@91.804,64.925 ccw(c91.761,65.653) pad.0@92.306,65.169 ; 91.948,64.469 cw(c92.822,64.469) pad.0@92.322,65.186 ; 91.948,64.469 cw(c92.822,64.469) pad.0@92.322,65.186 ; 91.948,64.469 cw(c92.822,64.469) pad.0@92.322,65.186 ; 92.75,63.692 pad.0@92.75,64.658 ; 92.75,63.692 93.447,64.389 93.447,64.735 pad.0@92.75,65.432 pad.0@92.75,64.658 ; 92.75,63.692 ccw(c91.696,64.746) pad.0@93.073,65.317 ; 92.75,63.692 ccw(c91.696,64.746) pad.0@93.073,65.317 ; 92.75,63.692 ccw(c91.696,64.746) pad.0@93.073,65.317 ; pad.0@92.943,65.238 ccw(c93.701,65.996) pad.0@93.701,64.925 ; pad.0@92.943,65.238 ccw(c93.701,65.996) pad.0@93.701,64.925 ; pad.0@92.943,65.238 ccw(c93.701,65.996) pad.0@93.701,64.925 ; pad.0@93.042,65.373 ccw(c93.891,65.906) pad.0@93.667,64.929 ; pad.0@93.042,65.373 ccw(c93.891,65.906) pad.0@93.667,64.929 ; pad.0@93.042,65.373 ccw(c93.891,65.906) pad.0@93.667,64.929 ; pad.0@93.042,65.373 ccw(c93.891,65.906) pad.0@93.667,64.929 ; pad.0@93.042,65.373 ccw(c93.891,65.906) pad.0@93.667,64.929 ; pad.0@93.042,65.373 ccw(c93.891,65.906) pad.0@93.667,64.929 ; pad.0@93.138,65.22 cw(c92.392,64.474) 93.447,64.474 ; pad.0@93.138,65.22 cw(c92.392,64.474) 93.447,64.474 ; pad.0@93.138,65.22 cw(c92.392,64.474) 93.447,64.474 ; pad.0@93.447,64.824 cw(c93.952,64.824) pad.0@93.595,65.181 ; pad.0@93.447,64.824 cw(c93.952,64.824) pad.0@93.595,65.181 ; pad.0@93.447,64.824 cw(c93.952,64.824) pad.0@93.595,65.181 ; pad.0@93.447,64.824 cw(c93.952,64.824) pad.0@93.595,65.181 ; pad.0@93.447,64.824 cw(c93.952,64.824) pad.0@93.595,65.181 ; pad.0@93.447,64.824 cw(c93.952,64.824) pad.0@93.595,65.181 ; 93.651,64.594 ccw(c93.17,65.075) pad.0@93.851,65.075 ; 93.651,64.594 ccw(c93.17,65.075) pad.0@93.851,65.075 ; 93.651,64.594 ccw(c93.17,65.075) pad.0@93.851,65.075 ; 93.651,64.594 ccw(c93.17,65.075) pad.0@93.851,65.075 ; 93.651,64.594 ccw(c93.17,65.075) pad.0@93.851,65.075 ; 93.651,64.594 ccw(c93.17,65.075) pad.0@93.851,65.075
  other v7: 91.796,65.075 93.701,65.075
8.4V: C2.2 D4.1 POWS.1 R11.2 R22.2 U5.3@119.7,100.55 U6.3@114.8,94.182 | length 228.6
  Top Layer w0.4: v1@122.25,72.746 122.452,72.746 124.13,72.746 124.714,73.33 R22.2@125.439,73.33
  Top Layer w0.5: U6.3@115.138,94.158 115.424,94.158 ; U6.3@114.941,94.015 cw(c115.285,93.672) 115.285,94.158 ; U6.3@114.941,94.015 cw(c115.285,93.672) 115.285,94.158 ; U6.3@114.941,94.015 cw(c115.285,93.672) 115.285,94.158 ; U6.3@114.941,94.298 ccw(c115.28,94.637) 115.28,94.158 ; U6.3@114.941,94.298 ccw(c115.28,94.637) 115.28,94.158 ; U6.3@114.941,94.298 ccw(c115.28,94.637) 115.28,94.158
  Top Layer w0.6: 115.4,94.182 115.424,94.158
  Top Layer w0.7: 110.396,88.4 111.797,89.801 111.797,91.706 114.249,94.158 U6.3@115.138,94.158 ; C2.2@111.85,91.232 cw(c113.121,91.232) 112.222,92.131 ; C2.2@111.594,91.126 cw(c111.103,90.635) 111.797,90.635 ; C2.2@111.594,91.126 cw(c111.103,90.635) 111.797,90.635 ; C2.2@111.594,91.126 cw(c111.103,90.635) 111.797,90.635 ; 113.687,93.596 cw(c114.8,92.483) U6.3@114.8,94.057 ; 113.687,93.596 cw(c114.8,92.483) U6.3@114.8,94.057 ; 113.687,93.596 cw(c114.8,92.483) U6.3@114.8,94.057 ; U6.3@114.367,93.941 ccw(c114.219,94.492) U6.3@114.713,94.207 ; U6.3@114.367,93.941 ccw(c114.219,94.492) U6.3@114.713,94.207 ; U6.3@114.367,93.941 ccw(c114.219,94.492) U6.3@114.713,94.207
  Top Layer w0.8: R11.2@108.55,84.932 109.265,84.932 109.906,85.573 ; R11.2@108.609,85.1 ccw(c108.749,86.729) 109.906,85.573 ; 110.396,88.4 109.906,87.909 109.906,85.573 ; 115.424,94.158 v2(116.135,94.158) ; v2(118.415,96.977) 118.593,97.155 118.593,98.165 119.304,98.876 119.304,100.025 U5.3@119.736,100.457 ; 122.25,73.29 122.25,75.286 ; v5@122.422,67.094 122.422,69.127 122.43,70.077 122.441,71.347 122.452,72.667 122.452,72.746 v1@122.453,72.873 ; v1@122.139,68.824 cw(c121.454,68.139) 122.422,68.139 ; v1@122.139,68.824 cw(c121.454,68.139) 122.422,68.139 ; v1@122.139,68.824 cw(c121.454,68.139) 122.422,68.139 ; v1@122.139,68.895 ccw(c121.454,69.58) 122.422,69.58 ; v1@122.139,68.895 ccw(c121.454,69.58) 122.422,69.58 ; v1@122.139,68.895 ccw(c121.454,69.58) 122.422,69.58 ; v1@122.139,72.634 cw(c121.454,71.949) 122.422,71.949 ; v1@122.139,72.634 cw(c121.454,71.949) 122.422,71.949 ; v1@122.139,72.634 cw(c121.454,71.949) 122.422,71.949 ; v1@122.164,70.043 cw(c121.54,69.42) 122.422,69.42 ; v1@122.164,70.043 cw(c121.54,69.42) 122.422,69.42 ; v1@122.164,70.043 cw(c121.54,69.42) 122.422,69.42 ; v1@122.164,70.114 ccw(c121.54,70.738) 122.422,70.738 ; v1@122.164,70.114 ccw(c121.54,70.738) 122.422,70.738 ; v1@122.164,70.114 ccw(c121.54,70.738) 122.422,70.738 ; v1@122.164,71.313 cw(c121.54,70.69) 122.422,70.69 ; v1@122.164,71.313 cw(c121.54,70.69) 122.422,70.69 ; v1@122.164,71.313 cw(c121.54,70.69) 122.422,70.69 ; v1@122.164,71.384 ccw(c121.54,72.008) 122.422,72.008 ; v1@122.164,71.384 ccw(c121.54,72.008) 122.422,72.008 ; v1@122.164,71.384 ccw(c121.54,72.008) 122.422,72.008
  Top Layer w1: v5@121.082,67.437 121.419,67.1 ; v5@122.422,67.094 v5@122.063,66.735 ; D4.1@125.15,66 122.798,66 v5@122.063,66.735 ; 120.117,73.063 cw(c122.303,73.063) POWS.1@120.757,74.609 ; 120.117,73.063 cw(c122.303,73.063) POWS.1@120.757,74.609 ; 120.117,73.063 cw(c122.303,73.063) POWS.1@120.757,74.609 ; POWS.1@120.117,74.409 120.117,67.208 120.968,66.358 121.685,66.358 v5@122.063,66.735 ; POWS.1@120.117,74.409 120.117,74.955 120.447,75.286 121.412,75.286 ; POWS.1@120.117,74.409 120.303,74.223 120.303,73.822 ; POWS.1@120.195,74.606 cw(c119.745,74.144) 120.303,73.822 ; POWS.1@120.195,74.606 cw(c119.745,74.144) 120.303,73.822 ; POWS.1@120.195,74.606 cw(c119.745,74.144) 120.303,73.822 ; POWS.1@120.578,74.503 cw(c120.147,72.757) v1@121.945,72.757 ; POWS.1@120.578,74.503 cw(c120.147,72.757) v1@121.945,72.757 ; POWS.1@120.578,74.503 cw(c120.147,72.757) v1@121.945,72.757 ; POWS.1@121.033,74.716 cw(c121.945,74.271) 121.945,75.286 ; POWS.1@121.033,74.716 cw(c121.945,74.271) 121.945,75.286 ; POWS.1@121.033,74.716 cw(c121.945,74.271) 121.945,75.286 ; POWS.1@121.033,74.716 cw(c121.945,74.271) 121.945,75.286 ; POWS.1@121.033,74.716 cw(c121.945,74.271) 121.945,75.286 ; POWS.1@121.033,74.716 cw(c121.945,74.271) 121.945,75.286 ; POWS.1@121.074,74.877 ccw(c122.105,74.84) 121.607,73.936 ; POWS.1@121.074,74.877 ccw(c122.105,74.84) 121.607,73.936 ; POWS.1@121.074,74.877 ccw(c122.105,74.84) 121.607,73.936 ; 121.135,68.161 ccw(c122.195,67.876) 121.419,67.1 ; 121.135,68.161 ccw(c122.195,67.876) 121.419,67.1 ; 121.135,68.161 ccw(c122.195,67.876) 121.419,67.1 ; 121.412,75.286 121.234,75.108 121.544,75.295 121.945,75.196 121.945,75.286 ; 121.412,75.286 121.945,75.286 ; 121.419,67.1 121.698,67.1 v5@122.063,66.735 ; 121.945,73.101 ccw(c122.605,73.101) v1@122.139,72.634 ; 121.945,73.101 ccw(c122.605,73.101) v1@122.139,72.634 ; 121.945,73.101 ccw(c122.605,73.101) v1@122.139,72.634 ; 121.945,73.101 ccw(c122.605,73.101) v1@122.139,72.634 ; 121.945,73.101 ccw(c122.605,73.101) v1@122.139,72.634 ; 121.945,73.101 ccw(c122.605,73.101) v1@122.139,72.634
  Bottom Layer w0.8: v2(116.135,94.158) 118.415,96.438 ; v2(118.415,96.977) 118.415,96.438 ; v2(119.304,98.984) 119.736,98.984 122.762,95.958 122.762,76.457 121.943,75.638 122.098,75.483 122.098,73.355 ; v5@122.58,66.802 122.58,72.39 ; 123.114,67.1 123.114,72.339 ; 118.415,96.438 ccw(c118.099,96.754) v2@118.464,97.012 ; 118.415,96.438 ccw(c118.099,96.754) v2@118.464,97.012 ; 118.415,96.438 ccw(c118.099,96.754) v2@118.464,97.012 ; 122.098,73.355 cw(c121.75,73.007) v1@122.135,72.701 ; 122.098,73.355 cw(c121.75,73.007) v1@122.135,72.701 ; 122.098,73.355 cw(c121.75,73.007) v1@122.135,72.701 ; 122.098,73.355 123.114,72.339 ; v1@122.139,68.824 cw(c121.072,67.758) 122.58,67.758 ; v1@122.139,68.824 cw(c121.072,67.758) 122.58,67.758 ; v1@122.139,68.824 cw(c121.072,67.758) 122.58,67.758 ; v1@122.139,68.895 ccw(c121.072,69.961) v1@122.58,69.961 ; v1@122.139,68.895 ccw(c121.072,69.961) v1@122.58,69.961 ; v1@122.139,68.895 ccw(c121.072,69.961) v1@122.58,69.961 ; v1@122.139,72.634 cw(c121.072,71.568) v1@122.58,71.568 ; v1@122.139,72.634 cw(c121.072,71.568) v1@122.58,71.568 ; v1@122.139,72.634 cw(c121.072,71.568) v1@122.58,71.568 ; v1@122.164,70.043 cw(c121.159,69.038) v1@122.58,69.038 ; v1@122.164,70.043 cw(c121.159,69.038) v1@122.58,69.038 ; v1@122.164,70.043 cw(c121.159,69.038) v1@122.58,69.038 ; v1@122.164,70.114 ccw(c121.159,71.119) v1@122.58,71.119 ; v1@122.164,70.114 ccw(c121.159,71.119) v1@122.58,71.119 ; v1@122.164,70.114 ccw(c121.159,71.119) v1@122.58,71.119 ; v1@122.164,71.313 cw(c121.159,70.308) v1@122.58,70.308 ; v1@122.164,71.313 cw(c121.159,70.308) v1@122.58,70.308 ; v1@122.164,71.313 cw(c121.159,70.308) v1@122.58,70.308 ; v1@122.164,71.384 ccw(c121.159,72.389) 122.58,72.389 ; v1@122.164,71.384 ccw(c121.159,72.389) 122.58,72.389 ; v1@122.164,71.384 ccw(c121.159,72.389) 122.58,72.389 ; v1@122.184,72.62 cw(c122.386,71.612) 123.114,72.339 ; v1@122.184,72.62 cw(c122.386,71.612) 123.114,72.339 ; v1@122.184,72.62 cw(c122.386,71.612) 123.114,72.339 ; 122.357,67.171 ccw(c121.819,67.709) 122.58,67.709 ; 122.357,67.171 ccw(c120.531,68.997) 123.114,68.997 cw(c120.531,68.997) 122.357,67.171 ; 122.357,67.171 ccw(c121.819,67.709) 122.58,67.709 ; 122.357,67.171 ccw(c121.819,67.709) 122.58,67.709 ; 118.136,96.158 ccw(c117.317,96.977) 118.475,96.977 cw(c117.317,96.977) 118.136,96.158 ; v2@119.304,99.044 cw(c119.304,98.146) 119.939,98.781 ccw(c119.304,98.146) v2@119.304,99.044
  Bottom Layer w1: 120.091,67.107 120.396,66.802 v5@122.58,66.802 ; POWS.1@120.574,74.892 POWS.1@120.091,74.409 ; POWS.1@121.082,75.235 POWS.1@121.209,75.108 ; 121.412,75.108 121.564,75.26 120.396,75.26 120.091,74.955 POWS.1@120.091,74.409 ; 120.091,73.358 cw(c121.586,73.358) POWS.1@120.709,74.568 ; 120.091,73.358 cw(c121.586,73.358) POWS.1@120.709,74.568 ; 120.091,73.358 cw(c121.586,73.358) POWS.1@120.709,74.568 ; POWS.1@120.091,74.409 120.091,73.406 120.32,73.177 121.92,73.177 121.92,75.286 ; POWS.1@120.575,74.504 cw(c120.133,72.773) v1@121.92,72.773 ; POWS.1@120.575,74.504 cw(c120.133,72.773) v1@121.92,72.773 ; POWS.1@120.575,74.504 cw(c120.133,72.773) v1@121.92,72.773 ; POWS.1@121.037,74.723 cw(c121.92,74.311) 121.92,75.286 ; POWS.1@121.037,74.723 cw(c121.92,74.311) 121.92,75.286 ; POWS.1@121.037,74.723 cw(c121.92,74.311) 121.92,75.286 ; 121.068,73.177 cw(c121.068,71.564) v1@122.209,72.705 ; 121.068,73.177 cw(c121.068,71.564) v1@122.209,72.705 ; 121.068,73.177 cw(c121.068,71.564) v1@122.209,72.705 ; 121.709,66.802 ccw(c121.709,67.819) v5@122.428,67.1 ; 121.709,66.802 ccw(c121.709,67.819) v5@122.428,67.1 ; 121.709,66.802 ccw(c121.709,67.819) v5@122.428,67.1 ; 121.857,73.006 ccw(c122.462,73.168) v1@122.149,72.626 ; 121.857,73.006 ccw(c122.462,73.168) v1@122.149,72.626 ; 121.857,73.006 ccw(c122.462,73.168) v1@122.149,72.626 ; 121.857,73.006 ccw(c122.462,73.168) v1@122.149,72.626 ; 121.857,73.006 ccw(c122.462,73.168) v1@122.149,72.626 ; 121.857,73.006 ccw(c122.462,73.168) v1@122.149,72.626 ; 121.92,73.162 ccw(c122.667,73.162) v1@122.139,72.634 ; 121.92,73.162 ccw(c122.667,73.162) v1@122.139,72.634 ; 121.92,73.162 ccw(c122.667,73.162) v1@122.139,72.634 ; 121.92,73.162 ccw(c122.667,73.162) v1@122.139,72.634 ; 121.92,73.162 ccw(c122.667,73.162) v1@122.139,72.634 ; 121.92,73.162 ccw(c122.667,73.162) v1@122.139,72.634
  other v1: 120.599,68.682 122.174,68.859 120.574,70.053 122.199,70.079 120.574,71.323 122.199,71.349 120.548,72.644 122.174,72.669
  other v5: 122.225,66.675 120.599,67.412
8V: 
38BC1: BC1.1 pad.0@90.932,112.98 R6.1 R10.1 R10.2 U1.20 | length 134.3
  Top Layer w0.254: v2(82.499,43.028) 84.261,44.789 84.261,53.832 86.36,55.931 86.36,59.69 84.557,61.493 v2(83.312,61.493) ; R10.2@83.2,74.182 R10.2@83.212,74.193 ; v2(89.84,79.527) 89.84,82.398 89.51,82.728 89.51,85.065 90.043,85.598 v2(90.043,86.284) ; v2@90.043,86.278 U1.20@91.775,86.278 ; v2@83.463,61.343 cw(c83.826,60.979) 83.826,61.493 ; v2@83.463,61.343 cw(c83.826,60.979) 83.826,61.493 ; v2@83.463,61.343 cw(c83.826,60.979) 83.826,61.493 ; v2@83.463,61.644 ccw(c83.826,62.008) 83.826,61.493 ; v2@83.463,61.644 ccw(c83.826,62.008) 83.826,61.493 ; v2@83.463,61.644 ccw(c83.826,62.008) 83.826,61.493 ; v2@89.689,79.678 ccw(c89.326,80.042) 89.84,80.042 ; v2@89.689,79.678 ccw(c89.326,80.042) 89.84,80.042 ; v2@89.689,79.678 ccw(c89.326,80.042) 89.84,80.042 ; 89.84,80.042 ccw(c90.354,80.042) v2@89.99,79.678 ; 89.84,80.042 ccw(c90.354,80.042) v2@89.99,79.678 ; 89.84,80.042 ccw(c90.354,80.042) v2@89.99,79.678 ; v2@90.194,86.133 cw(c90.542,85.785) 90.542,86.278 ; v2@90.194,86.133 cw(c90.542,85.785) 90.542,86.278 ; v2@90.194,86.133 cw(c90.542,85.785) 90.542,86.278 ; v2@90.194,86.434 ccw(c90.572,86.813) 90.572,86.278 ; v2@90.194,86.434 ccw(c90.572,86.813) 90.572,86.278 ; v2@90.194,86.434 ccw(c90.572,86.813) 90.572,86.278 ; 90.953,86.278 ccw(c90.953,86.574) U1.20@91.163,86.364 ; 90.953,86.278 cw(c90.953,85.981) U1.20@91.163,86.191 ; 90.953,86.278 ccw(c90.953,86.574) U1.20@91.163,86.364 ; 90.953,86.278 cw(c90.953,85.981) U1.20@91.163,86.191 ; 90.953,86.278 ccw(c90.953,86.574) U1.20@91.163,86.364 ; 90.953,86.278 cw(c90.953,85.981) U1.20@91.163,86.191
  Top Layer w0.7: R10.2@83.212,74.193 v2(84.277,74.193) ; R10.1@83.415,75.667 v2(84.252,75.667) ; R6.1@88.042,89.2 88.59,89.2 v2(88.824,89.433) ; R10.1@83.306,75.938 ccw(c83.961,76.593) v2@83.961,75.667 ; R10.1@83.306,75.938 ccw(c83.961,76.593) v2@83.961,75.667 ; R10.1@83.306,75.938 ccw(c83.961,76.593) v2@83.961,75.667 ; 88.284,89.2 ccw(c88.284,89.973) v2@88.831,89.426 ; 88.284,89.2 ccw(c88.284,89.973) v2@88.831,89.426 ; 88.284,89.2 ccw(c88.284,89.973) v2@88.831,89.426
  Top Layer w0.8: v2(82.499,43.028) 82.982,43.51 ; 92.944,31.4 92.944,34.032
  Bottom Layer w0.254: 82.626,62.179 82.626,72.542 v2(84.277,74.193) ; v2@82.637,43.028 82.637,37.684 85.117,35.204 92.1,35.204 92.944,34.361 BC1.1@92.944,32.8 ; v2@84.201,75.616 83.871,75.946 ; v2(89.84,79.527) 89.205,78.892 84.836,78.892 84.609,78.892 83.871,78.154 83.871,77.927 83.871,75.946 ; v2@90.018,86.278 90.018,88.24 v2(88.824,89.433) 87.859,90.399 87.859,99.898 88.417,100.457 88.417,110.007 90.373,111.963 90.907,111.963 ; 83.871,75.946 ccw(c84.092,76.167) v2@84.187,75.869 ; 83.871,75.946 ccw(c84.092,76.167) v2@84.187,75.869 ; 83.871,75.946 ccw(c84.092,76.167) v2@84.187,75.869 ; 83.914,73.83 ccw(c83.55,74.193) 84.064,74.193 cw(c83.55,74.193) 83.914,73.83 ; 83.914,73.83 cw(c84.277,73.466) 84.277,73.98 ccw(c84.277,73.466) 83.914,73.83 ; 83.96,75.857 cw(c83.77,75.667) v2@84.039,75.667 ; 83.96,75.857 cw(c83.77,75.667) v2@84.039,75.667 ; 83.96,75.857 cw(c83.77,75.667) v2@84.039,75.667 ; 89.187,89.07 ccw(c88.824,88.706) 88.824,89.22 cw(c88.824,88.706) 89.187,89.07 ; 89.187,89.07 cw(c89.551,89.433) 89.037,89.433 ccw(c89.551,89.433) 89.187,89.07 ; 89.476,79.164 ccw(c89.113,79.527) 89.627,79.527 cw(c89.113,79.527) 89.476,79.164 ; 89.476,79.164 cw(c89.84,78.8) 89.84,79.314 ccw(c89.84,78.8) 89.476,79.164
  Bottom Layer w0.6: 90.932,111.989 pad.0@90.932,113.012 ; pad.0@90.685,112.683 cw(c90.087,112.085) 90.932,112.085 ; pad.0@90.685,112.683 cw(c90.087,112.085) 90.932,112.085 ; pad.0@90.685,112.683 cw(c90.087,112.085) 90.932,112.085 ; 90.932,112.085 cw(c91.777,112.085) pad.0@91.179,112.683 ; 90.932,112.085 cw(c91.777,112.085) pad.0@91.179,112.683 ; 90.932,112.085 cw(c91.777,112.085) pad.0@91.179,112.683
  Bottom Layer w0.7: 82.626,62.179 v2(83.312,61.493) ; 83.693,76.251 v2@84.277,75.667
  Bottom Layer w0.8: 92.94,31.4 92.944,34.036
38BC2: BC2.2 pad.0@89.85,115.832 R7.2 U1.21 | length 145.6
  Top Layer w0.254: 84.658,92.227 84.686,92.2 R7.2@85.942,92.2 ; 86.157,74.117 86.462,74.447 86.462,77.699 84.15,80.01 84.15,88.163 84.633,88.646 84.633,89.433 84.633,96.393 88.595,100.355 88.595,109.753 90.449,111.608 91.643,111.608 92.256,112.22 92.256,115.694 91.923,116.027 ; U1.21@91.775,85.478 U1.21@91.807,85.446 ; 84.992,92.2 ccw(c84.992,93.1) R7.2@85.628,92.464 ; 84.992,92.2 cw(c84.992,91.3) R7.2@85.628,91.936 ; 84.992,92.2 ccw(c84.992,93.1) R7.2@85.628,92.464 ; 84.992,92.2 cw(c84.992,91.3) R7.2@85.628,91.936 ; 84.992,92.2 ccw(c84.992,93.1) R7.2@85.628,92.464 ; 84.992,92.2 cw(c84.992,91.3) R7.2@85.628,91.936
  Top Layer w0.3: U1.21@91.807,85.446 93.091,85.446 93.624,84.912 v2(93.624,83.744) ; U1.21@92.371,85.548 ccw(c92.619,85.796) 92.619,85.446 ; U1.21@92.371,85.548 ccw(c92.619,85.796) 92.619,85.446 ; U1.21@92.371,85.548 ccw(c92.619,85.796) 92.619,85.446 ; v2@93.49,83.878 ccw(c93.166,84.202) 93.624,84.202 ; v2@93.49,83.878 ccw(c93.166,84.202) 93.624,84.202 ; v2@93.49,83.878 ccw(c93.166,84.202) 93.624,84.202 ; 93.624,84.202 ccw(c94.083,84.202) v2@93.759,83.878 ; 93.624,84.202 ccw(c94.083,84.202) v2@93.759,83.878 ; 93.624,84.202 ccw(c94.083,84.202) v2@93.759,83.878
  Top Layer w0.6: 88.57,116.027 91.923,116.027 91.338,116.611 88.671,116.611 88.57,116.51 88.57,116.027
  Top Layer w0.7: v2(85.496,73.482) 85.738,73.724 86.157,74.117
  Top Layer w0.8: v2(80.772,36.246) 80.772,34.998 81.764,34.006 ; 81.664,31.4 81.664,34.006
  Bottom Layer w0.254: v2(80.772,36.246) 80.772,52.883 82.296,54.407 83.439,54.407 84.887,55.855 84.887,62.459 83.874,63.471 83.874,71.072 84.023,71.222 85.496,72.695 v2(85.496,73.482) 85.496,75.667 84.379,76.784 84.379,77.944 84.794,78.359 90.907,78.359 92.227,79.68 92.227,81.534 93.624,82.931 v2(93.624,83.744) ; 85.496,72.968 ccw(c84.982,72.968) 85.346,73.332 cw(c84.982,72.968) 85.496,72.968 ; 85.496,72.968 cw(c86.011,72.968) 85.647,73.332 ccw(c86.011,72.968) 85.496,72.968 ; 85.496,73.996 ccw(c86.011,73.996) 85.647,73.633 cw(c86.011,73.996) 85.496,73.996 ; 85.496,73.996 cw(c84.982,73.996) 85.346,73.633 ccw(c84.982,73.996) 85.496,73.996 ; 93.624,83.23 ccw(c93.11,83.23) 93.474,83.593 cw(c93.11,83.23) 93.624,83.23 ; 93.624,83.23 cw(c94.139,83.23) 93.775,83.593 ccw(c94.139,83.23) 93.624,83.23
  Bottom Layer w0.6: 88.57,116.027 91.542,116.027 90.957,116.611 88.671,116.611 88.57,116.51 88.57,116.027
  Bottom Layer w0.8: 81.664,31.4 81.664,34.006
38OUT: pad.0@88.8,112.98 U1.22 | length 39.9
  Top Layer w0.254: v2(90.246,84.557) 90.17,84.557 90.291,84.678 v2@90.557,84.678
  Top Layer w0.5: v2@90.557,84.678 U1.22@91.775,84.678
  Bottom Layer w0.254: 88.392,111.735 86.843,110.185 86.843,105.21 86.843,90.373 89.23,87.986 89.23,85.573 v2(90.246,84.557)
  Bottom Layer w0.6: pad.0@88.8,113.012 88.8,112.143 ; 88.392,111.735 ccw(c87.818,112.309) 88.504,112.743 cw(c87.818,112.309) 88.392,111.735 ; 88.392,111.735 88.8,112.143 ; pad.0@88.566,112.67 cw(c88.089,112.143) 88.8,112.143 ; pad.0@88.566,112.67 cw(c88.089,112.143) 88.8,112.143 ; pad.0@88.566,112.67 cw(c88.089,112.143) 88.8,112.143 ; 88.8,112.143 cw(c89.511,112.143) pad.0@89.035,112.67 ; 88.8,112.143 cw(c89.511,112.143) pad.0@89.035,112.67 ; 88.8,112.143 cw(c89.511,112.143) pad.0@89.035,112.67 ; 88.922,112.265 ccw(c88.468,112.72) 89.011,113.064 cw(c88.468,112.72) 88.922,112.265
84-D: 
<Z: CMZ.3 U1.13 | length 34.1
  Top Layer w0.254: CMZ.3@94.53,71.944 94.53,78.969 94.539,78.96 v2@94.539,78.842 ; U1.13@95.402,89.891 95.402,86.106 v2(95.783,85.725) ; CMZ.3@94.196,72.478 ccw(c93.388,73.286) 94.53,73.286 ; CMZ.3@94.196,72.478 ccw(c93.388,73.286) 94.53,73.286 ; CMZ.3@94.196,72.478 ccw(c93.388,73.286) 94.53,73.286 ; v2@94.388,78.649 cw(c94.046,78.307) 94.53,78.307 ; v2@94.388,78.649 cw(c94.046,78.307) 94.53,78.307 ; v2@94.388,78.649 cw(c94.046,78.307) 94.53,78.307 ; 94.53,73.286 ccw(c95.672,73.286) CMZ.3@94.864,72.478 ; 94.53,73.286 ccw(c95.672,73.286) CMZ.3@94.864,72.478 ; 94.53,73.286 ccw(c95.672,73.286) CMZ.3@94.864,72.478 ; 94.53,78.264 cw(c95.074,78.264) v2@94.689,78.649 ; 94.53,78.264 cw(c95.074,78.264) v2@94.689,78.649 ; 94.53,78.264 cw(c95.074,78.264) v2@94.689,78.649 ; U1.13@95.313,89.29 cw(c95.097,89.075) 95.402,89.075 ; U1.13@95.313,89.29 cw(c95.097,89.075) 95.402,89.075 ; U1.13@95.313,89.29 cw(c95.097,89.075) 95.402,89.075 ; 95.402,89.086 cw(c95.691,89.086) U1.13@95.487,89.29 ; 95.402,89.086 cw(c95.691,89.086) U1.13@95.487,89.29 ; 95.402,89.086 cw(c95.691,89.086) U1.13@95.487,89.29 ; 95.42,86.089 ccw(c95.783,86.452) v2@95.783,85.938 ; 95.42,86.089 cw(c95.056,85.725) v2@95.57,85.725 ; 95.42,86.089 ccw(c95.783,86.452) v2@95.783,85.938 ; 95.42,86.089 cw(c95.056,85.725) v2@95.57,85.725 ; 95.42,86.089 ccw(c95.783,86.452) v2@95.783,85.938 ; 95.42,86.089 cw(c95.056,85.725) v2@95.57,85.725
  Bottom Layer w0.254: v2@94.539,78.842 94.539,81.305 96.19,82.956 96.19,85.319 v2(95.783,85.725) ; 94.539,79.314 ccw(c95.053,79.314) 94.689,78.951 cw(c95.053,79.314) 94.539,79.314 ; 94.539,79.314 cw(c94.025,79.314) 94.388,78.951 ccw(c94.025,79.314) 94.539,79.314 ; 96.147,85.361 ccw(c95.783,84.998) 95.783,85.512 cw(c95.783,84.998) 96.147,85.361 ; 96.147,85.361 cw(c96.511,85.725) 95.996,85.725 ccw(c96.511,85.725) 96.147,85.361
  other v2: 94.539,78.8